# Altium PCB BMS_Slave_8S V0.1.PcbDoc (part 1 of 2)
Units mm, origin at the board's own origin, x right, y up, seen from the top; angles counter-clockwise.
Board outline 54 x 106.3 mm, 2 copper layers (Top Layer, Bottom Layer); 166 components, 124 nets, 443 pads, 56 vias.
Unrouted connection lines stored in the file: 225.
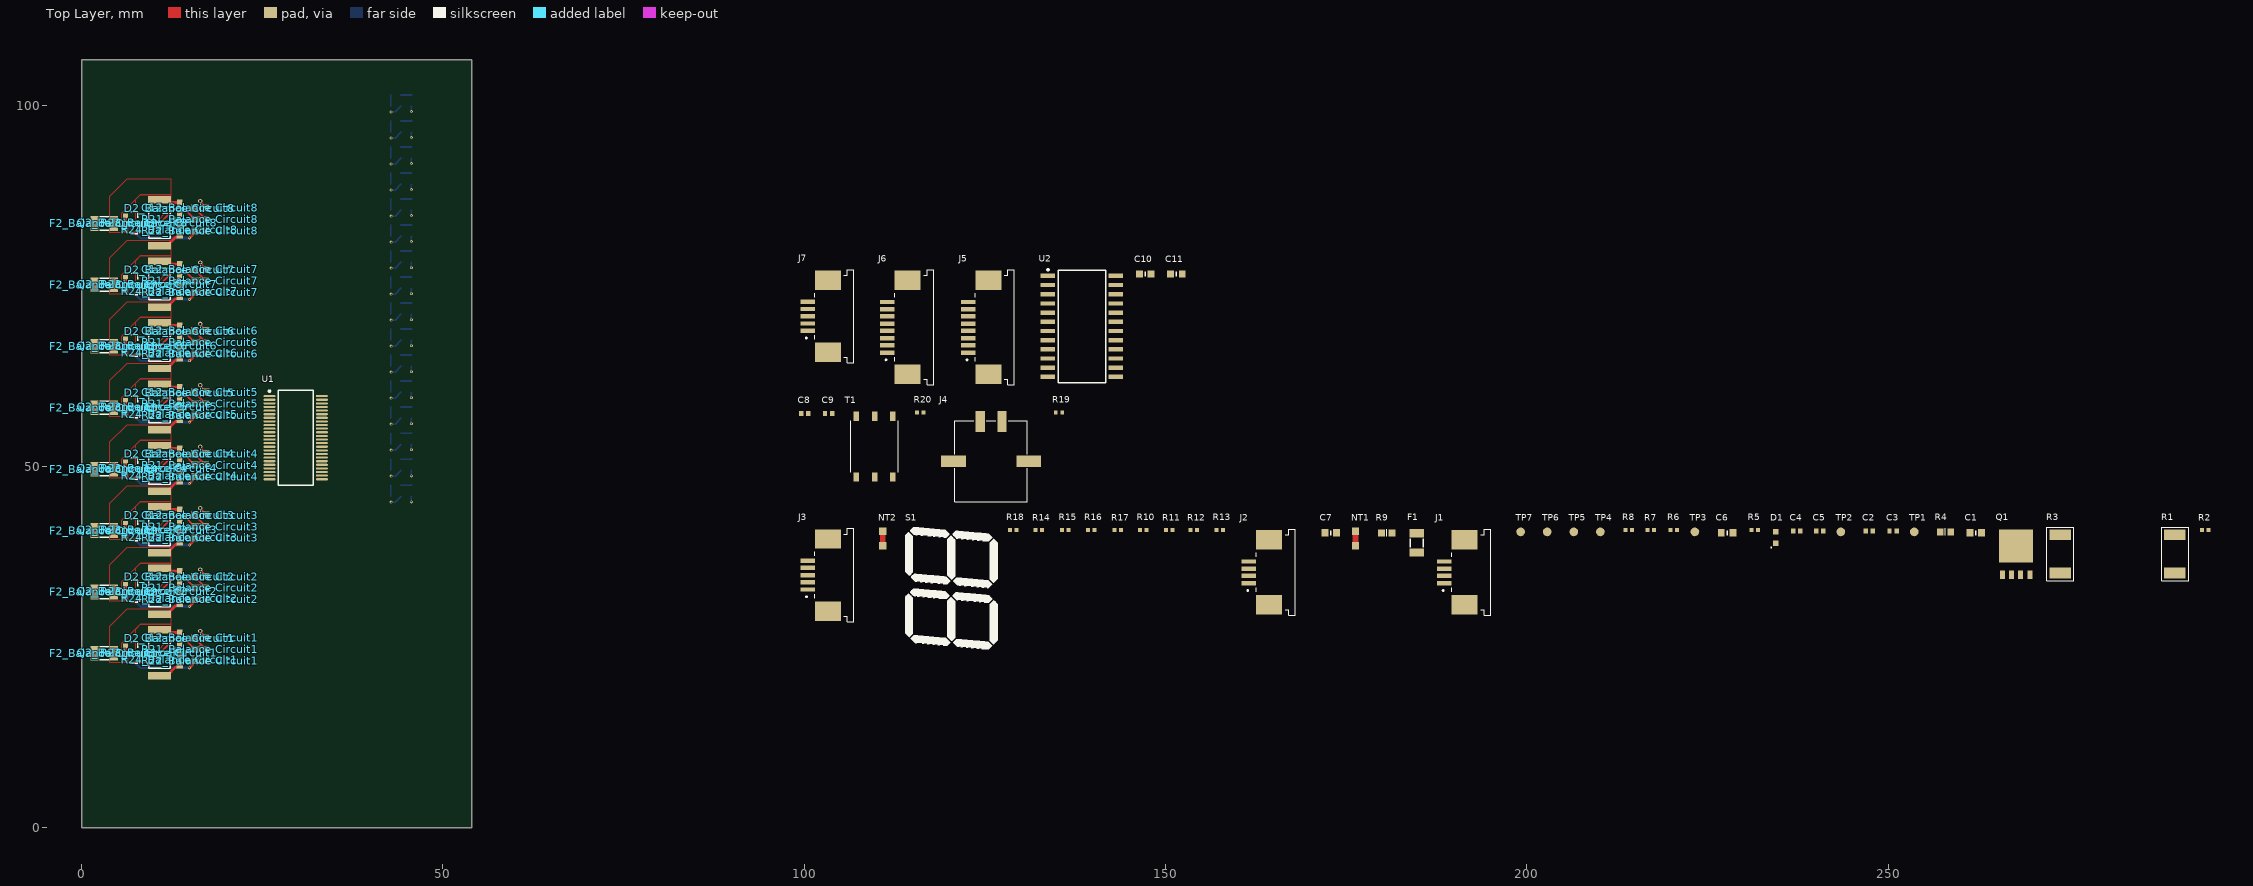
[diagram p0: Top Layer view]
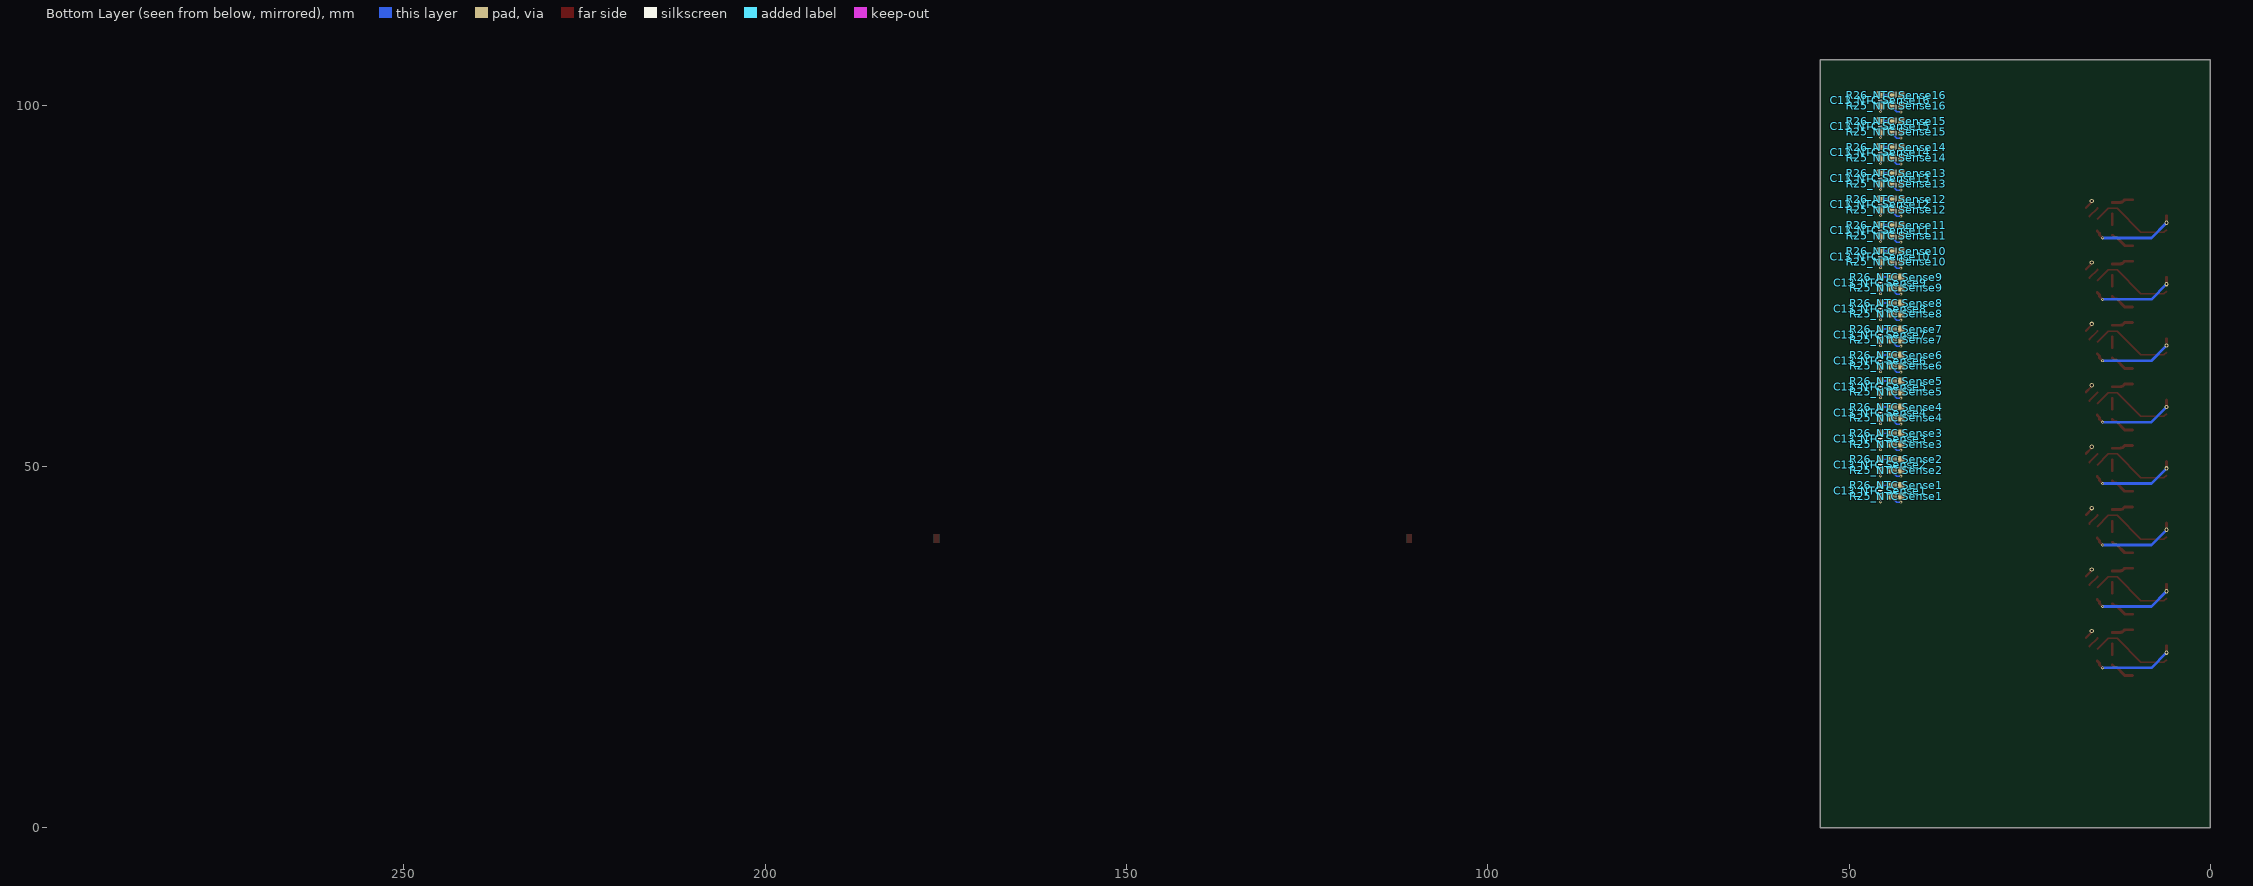
[diagram p1: Bottom Layer view, seen from below]

## Layer stack, top to bottom
Top Solder: solder mask 0.0102, Solder Resist, Dk 3.5
Top Layer: signal copper 0.0356
Dielectric 1: dielectric 0.32, FR-4, Dk 4.8
Bottom Layer: signal copper 0.0356
Bottom Solder: solder mask 0.0102, Solder Resist, Dk 3.5

## Board outline
0,0 0,106.3 54,106.3 54,0

## Design rules (kind name [scope] priority, off if disabled: settings)
BoardOutlineClearance BoardOutlineClearance_Silk [OnLayer('Top Overlay') or OnLayer('Bottom Overlay')] p1: gap=0 ignorepadtopadclearanceinfootprint=FALSE
BoardOutlineClearance [All] p2: gap=0.5 ignorepadtopadclearanceinfootprint=FALSE except(0: Arc-SplitContinuation Track-SplitContinuation SMDPad-SplitContinuation THPad-SplitContinuation Via-SplitContinuation Fill-SplitContinuation Poly-SplitContinuation Region-SplitContinuation Text-SplitContinuation)
Clearance [All] p1: gap=0.152 ignorepadtopadclearanceinfootprint=FALSE
ComponentClearance ComponentClearance-NT [HasFootprint('NetTie')] p1: gap=0 collisioncheckmode=3 verticalgap=0 showdistances=FALSE
ComponentClearance [All] p2: gap=0.254 collisioncheckmode=3 verticalgap=0.254 showdistances=FALSE
DiffPairsRouting [InDifferentialPairClass('isoSPI')] p1: maxlimit=0.254 minlimit=0.254 mostfreqgap=0.254 toplayer_minwidth=0.152 toplayer_maxwidth=0.152 toplayer_prefwidth=0.152 bottomlayer_minwidth=0.152 bottomlayer_maxwidth=0.152 bottomlayer_prefwidth=0.152 impedanceprofiledriven=TRUE impedanceprofileid={1BC84866-0E51-48B1-BDBB-AED9452DC2EB} maxuncoupledlength=50
HoleSize [All] p1: absolutevalues=TRUE maxlimit=6.3 minlimit=0.2 maxpercent=80.000 minpercent=20.000
HoleToHoleClearance [All] p1: gap=0.279 allowstackedmicrovias=TRUE
MinimumAnnularRing [All] p1: minimumring=0.152
MinimumSolderMaskSliver [All] p1: minsoldermaskwidth=0.102
PlaneConnect [All] p1: planeconnectstyle=Direct reliefexpansion=0.508 reliefentries=4 reliefconductorwidth=0.254 reliefairgap=0.254
PolygonConnect PolygonConnect-Passive [HasFootprint('C-0402') or HasFootprint('R_0402') or HasFootprint('C_0603') or HasFootprint('R-0603')] p1: thpad.connectstyle=Direct thpad.reliefconductorwidth=0.254 thpad.reliefentries=4 thpad.polygonreliefangle="90 Angle" thpad.airgapwidth=0.254 smdpad.connectstyle=Relief smdpad.reliefconductorwidth=0.254 smdpad.reliefentries=4 smdpad.polygonreliefangle="90 Angle" smdpad.airgapwidth=0.254 via.connectstyle=Direct via.reliefconductorwidth=0.254 via.reliefentries=4 via.polygonreliefangle="90 Angle" via.airgapwidth=0.254
PolygonConnect "Power Connect" [All] p2: connectstyle=Direct reliefconductorwidth=0.254 reliefentries=4 polygonreliefangle="90 Angle" airgapwidth=0.254
PolygonConnect [All] p3: thpad.connectstyle=Direct thpad.reliefconductorwidth=0.254 thpad.reliefentries=4 thpad.polygonreliefangle="90 Angle" thpad.airgapwidth=0.254 smdpad.connectstyle=Relief smdpad.reliefconductorwidth=0.254 smdpad.reliefentries=4 smdpad.polygonreliefangle="90 Angle" smdpad.airgapwidth=0.254 via.connectstyle=Direct via.reliefconductorwidth=0.254 via.reliefentries=4 via.polygonreliefangle="90 Angle" via.airgapwidth=0.254
RoomDefinition "Balance Circuit2" [InComponentClass('Balance Circuit2')] p1: confinementstyle=ConfineIn formatcopy=TRUE lockcomponents=FALSE outline 0.575,28.475 18.2,28.475 18.2,36.975 0.575,36.975
RoomDefinition "Balance Circuit1" [InComponentClass('Balance Circuit1')] p2: confinementstyle=ConfineIn formatcopy=TRUE lockcomponents=FALSE outline 0.575,19.975 18.2,19.975 18.2,28.475 0.575,28.475
RoomDefinition "Balance Circuit3" [InComponentClass('Balance Circuit3')] p3: confinementstyle=ConfineIn formatcopy=TRUE lockcomponents=FALSE outline 0.575,36.975 18.2,36.975 18.2,45.475 0.575,45.475
RoomDefinition "Balance Circuit4" [InComponentClass('Balance Circuit4')] p4: confinementstyle=ConfineIn formatcopy=TRUE lockcomponents=FALSE outline 0.575,45.475 18.2,45.475 18.2,53.975 0.575,53.975
RoomDefinition "Balance Circuit5" [InComponentClass('Balance Circuit5')] p5: confinementstyle=ConfineIn formatcopy=TRUE lockcomponents=FALSE outline 0.575,53.975 18.2,53.975 18.2,62.475 0.575,62.475
RoomDefinition "Balance Circuit6" [InComponentClass('Balance Circuit6')] p6: confinementstyle=ConfineIn formatcopy=TRUE lockcomponents=FALSE outline 0.575,62.475 18.2,62.475 18.2,70.975 0.575,70.975
RoomDefinition "Balance Circuit7" [InComponentClass('Balance Circuit7')] p7: confinementstyle=ConfineIn formatcopy=TRUE lockcomponents=FALSE outline 0.575,70.975 18.2,70.975 18.2,79.475 0.575,79.475
RoomDefinition "Balance Circuit8" [InComponentClass('Balance Circuit8')] p8: confinementstyle=ConfineIn formatcopy=TRUE lockcomponents=FALSE outline 0.575,79.475 18.2,79.475 18.2,87.975 0.575,87.975
RoomDefinition "U_Temperature Sensing" [InComponentClass('U_Temperature Sensing')] p9: confinementstyle=ConfineIn formatcopy=TRUE lockcomponents=FALSE outline 98.925,60.75 153.325,60.75 153.325,77.775 98.925,77.775
RoomDefinition U_IsoSPI [InComponentClass('U_IsoSPI')] p10: confinementstyle=ConfineIn formatcopy=TRUE lockcomponents=FALSE outline 98.85,44.6 136.45,44.6 136.45,58.2 98.85,58.2
RoomDefinition "NTC Sense16" [InComponentClass('NTC Sense16')] p11: confinementstyle=ConfineIn formatcopy=TRUE lockcomponents=FALSE outline 41.75,98.85 46.75,98.85 46.75,102.45 41.75,102.45
RoomDefinition "NTC Sense15" [InComponentClass('NTC Sense15')] p12: confinementstyle=ConfineIn formatcopy=TRUE lockcomponents=FALSE outline 41.75,95.25 46.75,95.25 46.75,98.85 41.75,98.85
RoomDefinition "NTC Sense14" [InComponentClass('NTC Sense14')] p13: confinementstyle=ConfineIn formatcopy=TRUE lockcomponents=FALSE outline 41.75,91.65 46.75,91.65 46.75,95.25 41.75,95.25
RoomDefinition "NTC Sense13" [InComponentClass('NTC Sense13')] p14: confinementstyle=ConfineIn formatcopy=TRUE lockcomponents=FALSE outline 41.75,88.05 46.75,88.05 46.75,91.65 41.75,91.65
RoomDefinition "NTC Sense12" [InComponentClass('NTC Sense12')] p15: confinementstyle=ConfineIn formatcopy=TRUE lockcomponents=FALSE outline 41.75,84.45 46.75,84.45 46.75,88.05 41.75,88.05
RoomDefinition "NTC Sense11" [InComponentClass('NTC Sense11')] p16: confinementstyle=ConfineIn formatcopy=TRUE lockcomponents=FALSE outline 41.75,80.85 46.75,80.85 46.75,84.45 41.75,84.45
RoomDefinition "NTC Sense10" [InComponentClass('NTC Sense10')] p17: confinementstyle=ConfineIn formatcopy=TRUE lockcomponents=FALSE outline 41.75,77.25 46.75,77.25 46.75,80.85 41.75,80.85
RoomDefinition "NTC Sense9" [InComponentClass('NTC Sense9')] p18: confinementstyle=ConfineIn formatcopy=TRUE lockcomponents=FALSE outline 41.75,73.65 46.75,73.65 46.75,77.25 41.75,77.25
RoomDefinition "NTC Sense8" [InComponentClass('NTC Sense8')] p19: confinementstyle=ConfineIn formatcopy=TRUE lockcomponents=FALSE outline 41.75,70.05 46.75,70.05 46.75,73.65 41.75,73.65
RoomDefinition "NTC Sense7" [InComponentClass('NTC Sense7')] p20: confinementstyle=ConfineIn formatcopy=TRUE lockcomponents=FALSE outline 41.75,66.45 46.75,66.45 46.75,70.05 41.75,70.05
RoomDefinition "NTC Sense6" [InComponentClass('NTC Sense6')] p21: confinementstyle=ConfineIn formatcopy=TRUE lockcomponents=FALSE outline 41.75,62.85 46.75,62.85 46.75,66.45 41.75,66.45
RoomDefinition "NTC Sense5" [InComponentClass('NTC Sense5')] p22: confinementstyle=ConfineIn formatcopy=TRUE lockcomponents=FALSE outline 41.75,59.25 46.75,59.25 46.75,62.85 41.75,62.85
RoomDefinition "NTC Sense4" [InComponentClass('NTC Sense4')] p23: confinementstyle=ConfineIn formatcopy=TRUE lockcomponents=FALSE outline 41.75,55.65 46.75,55.65 46.75,59.25 41.75,59.25
RoomDefinition "NTC Sense3" [InComponentClass('NTC Sense3')] p24: confinementstyle=ConfineIn formatcopy=TRUE lockcomponents=FALSE outline 41.75,52.05 46.75,52.05 46.75,55.65 41.75,55.65
RoomDefinition "NTC Sense2" [InComponentClass('NTC Sense2')] p25: confinementstyle=ConfineIn formatcopy=TRUE lockcomponents=FALSE outline 41.75,48.45 46.75,48.45 46.75,52.05 41.75,52.05
RoomDefinition "NTC Sense1" [InComponentClass('NTC Sense1')] p26: confinementstyle=ConfineIn formatcopy=TRUE lockcomponents=FALSE outline 41.75,44.85 46.75,44.85 46.75,48.45 41.75,48.45
RoutingVias [All] p1: holewidth=0.3 width=0.6 viastyle="Through Hole" minholewidth=0.2 minwidth=0.4 maxholewidth=0.4 maxwidth=0.7
ShortCircuit ShortCircuit_NT [HasFootprint('NetTie')] p1: allowed=TRUE
ShortCircuit [All] p2: allowed=FALSE
SilkToSilkClearance [All] p1: silktosilkclearance=0
SilkToSolderMaskClearance [IsPad] p1: minsilkscreentomaskgap=0.152 clearancetoexposedcopper=TRUE
SolderMaskExpansion SolderMaskExpansion_Via [isvia] p1: expansion=0.102 istentingtop=TRUE
SolderMaskExpansion [All] p2: expansion=0.051 istentingtop=FALSE
Width [All] p1: maxlimit=2.54 minlimit=0.152 preferedwidth=0.203
21 further rules are at their usual default settings.

## Classes and differential pairs
channel class "NTC Sense V0.1": "NTC Sense1" "NTC Sense2" "NTC Sense3" "NTC Sense4" "NTC Sense5" "NTC Sense6" "NTC Sense7" "NTC Sense8" "NTC Sense9" "NTC Sense10" "NTC Sense11" "NTC Sense12" "NTC Sense13" "NTC Sense14" "NTC Sense15" "NTC Sense16"
channel class "Balance V0.1": "Balance Circuit1" "Balance Circuit2" "Balance Circuit3" "Balance Circuit4" "Balance Circuit5" "Balance Circuit6" "Balance Circuit7" "Balance Circuit8"
differential pair class isoSPI: isoSPI. PORTA
net class Vc[8..1]: Vc1 Vc2 Vc3 Vc4 Vc5 Vc6 Vc7 Vc8
net class T[12..1]: B2 B3 B4 B5 B6 B7 B8 T8 T9 T10 T11 T12
net class S[8..1]: S1 S2 S3 S4 S5 S6 S7 S8
net class Out[16..1]: Out1 Out2 Out3 Out4 Out5 Out6 Out7 Out8 Out9 Out10 Out11 Out12 Out13 Out14 Out15 Out16
net class NTC[16..1]: NTC1 NTC2 NTC3 NTC4 NTC5 NTC6 NTC7 NTC8 NTC9 NTC10 NTC11 NTC12 NTC13 NTC14 NTC15 NTC16
net class C[8..1]: C1 C2 C3 C4 C5 C6 C7 C8
net class BalanceNetClass: B1 B2 B3 B4 B5 B6 B7 B8 "NetD2_Balance Circuit1_2" "NetD2_Balance Circuit2_2" "NetD2_Balance Circuit3_2" "NetD2_Balance Circuit4_2" "NetD2_Balance Circuit5_2" "NetD2_Balance Circuit6_2" "NetD2_Balance Circuit7_2" "NetD2_Balance Circuit8_2" T8
net class B[12..1]: B1 B2 B3 B4 B5 B6 B7 B8 B9 B10 B11 B12
component class "U_Temperature Sensing": C10 C11 J5 J6 J7 U2
component class U_IsoSPI: C8 C9 J4 R19 R20 T1
component class "U_Cell Monitor": C1 C2 C3 C4 C5 C6 C7 D1 F1 J1 J2 J3 NT1 NT2 Q1 R1 R2 R3 R4 R5 R6 R7 R8 R9 R10 R11 R12 R13 R14 R15 R16 R17 R18 S1 TP1 TP2 TP3 TP4 TP5 TP6 TP7 U1
component class "NTC Sense16": "C13_NTC Sense16" "R25_NTC Sense16" "R26_NTC Sense16"
component class "NTC Sense15": "C13_NTC Sense15" "R25_NTC Sense15" "R26_NTC Sense15"
component class "NTC Sense14": "C13_NTC Sense14" "R25_NTC Sense14" "R26_NTC Sense14"
component class "NTC Sense13": "C13_NTC Sense13" "R25_NTC Sense13" "R26_NTC Sense13"
component class "NTC Sense12": "C13_NTC Sense12" "R25_NTC Sense12" "R26_NTC Sense12"
component class "NTC Sense11": "C13_NTC Sense11" "R25_NTC Sense11" "R26_NTC Sense11"
component class "NTC Sense10": "C13_NTC Sense10" "R25_NTC Sense10" "R26_NTC Sense10"
component class "NTC Sense9": "C13_NTC Sense9" "R25_NTC Sense9" "R26_NTC Sense9"
component class "NTC Sense8": "C13_NTC Sense8" "R25_NTC Sense8" "R26_NTC Sense8"
component class "NTC Sense7": "C13_NTC Sense7" "R25_NTC Sense7" "R26_NTC Sense7"
component class "NTC Sense6": "C13_NTC Sense6" "R25_NTC Sense6" "R26_NTC Sense6"
component class "NTC Sense5": "C13_NTC Sense5" "R25_NTC Sense5" "R26_NTC Sense5"
component class "NTC Sense4": "C13_NTC Sense4" "R25_NTC Sense4" "R26_NTC Sense4"
component class "NTC Sense3": "C13_NTC Sense3" "R25_NTC Sense3" "R26_NTC Sense3"
component class "NTC Sense2": "C13_NTC Sense2" "R25_NTC Sense2" "R26_NTC Sense2"
component class "NTC Sense1": "C13_NTC Sense1" "R25_NTC Sense1" "R26_NTC Sense1"
component class "Balance Circuit8": "C12_Balance Circuit8" "D2_Balance Circuit8" "F2_Balance Circuit8" "Q2_Balance Circuit8" "R21_Balance Circuit8" "R22_Balance Circuit8" "R23_Balance Circuit8" "R24_Balance Circuit8"
component class "Balance Circuit7": "C12_Balance Circuit7" "D2_Balance Circuit7" "F2_Balance Circuit7" "Q2_Balance Circuit7" "R21_Balance Circuit7" "R22_Balance Circuit7" "R23_Balance Circuit7" "R24_Balance Circuit7"
component class "Balance Circuit6": "C12_Balance Circuit6" "D2_Balance Circuit6" "F2_Balance Circuit6" "Q2_Balance Circuit6" "R21_Balance Circuit6" "R22_Balance Circuit6" "R23_Balance Circuit6" "R24_Balance Circuit6"
component class "Balance Circuit5": "C12_Balance Circuit5" "D2_Balance Circuit5" "F2_Balance Circuit5" "Q2_Balance Circuit5" "R21_Balance Circuit5" "R22_Balance Circuit5" "R23_Balance Circuit5" "R24_Balance Circuit5"
component class "Balance Circuit4": "C12_Balance Circuit4" "D2_Balance Circuit4" "F2_Balance Circuit4" "Q2_Balance Circuit4" "R21_Balance Circuit4" "R22_Balance Circuit4" "R23_Balance Circuit4" "R24_Balance Circuit4"
component class "Balance Circuit3": "C12_Balance Circuit3" "D2_Balance Circuit3" "F2_Balance Circuit3" "Q2_Balance Circuit3" "R21_Balance Circuit3" "R22_Balance Circuit3" "R23_Balance Circuit3" "R24_Balance Circuit3"
component class "Balance Circuit2": "C12_Balance Circuit2" "D2_Balance Circuit2" "F2_Balance Circuit2" "Q2_Balance Circuit2" "R21_Balance Circuit2" "R22_Balance Circuit2" "R23_Balance Circuit2" "R24_Balance Circuit2"
component class "Balance Circuit1": "C12_Balance Circuit1" "D2_Balance Circuit1" "F2_Balance Circuit1" "Q2_Balance Circuit1" "R21_Balance Circuit1" "R22_Balance Circuit1" "R23_Balance Circuit1" "R24_Balance Circuit1"
differential pair PORTA: +PORTA_P -PORTA_N
differential pair isoSPI.: +isoSPI._P -isoSPI._N

## Components (designator, comment, footprint, x,y, rotation, side; value= is the part's Value field where it differs from the comment)
C1 "C" C_0603 262.138,40.807 r0 top value=100nF
C2 "C" C-0402 247.406,41.061 r0 top value=1uF
C3 "C" C-0402 250.708,41.061 r0 top value=100nF
C4 "C" C-0402 237.373,41.061 r0 top value=100nF
C5 "C" C-0402 240.548,41.061 r0 top value=1uF
C6 "C" C_0603 227.721,40.807 r0 top value=1uF
C7 "C" C_0603 172.857,40.807 r0 top value=10nF
C8 "C" C-0402 100.086,57.317 r0 top value=10nF
C9 "C" C-0402 103.388,57.317 r0 top value=10nF
C10 "C" C_0603 147.203,76.621 r0 top value=100nF
C11 "C" C_0603 151.521,76.621 r0 top value=1uF
"C12_Balance Circuit1" "C" C_0603 16.419,26.263 r180 top value=10nF (schematic designator C12)
"C12_Balance Circuit2" "C" C_0603 16.419,34.763 r180 top value=10nF (schematic designator C12)
"C12_Balance Circuit3" "C" C_0603 16.419,43.263 r180 top value=10nF (schematic designator C12)
"C12_Balance Circuit4" "C" C_0603 16.419,51.763 r180 top value=10nF (schematic designator C12)
"C12_Balance Circuit5" "C" C_0603 16.419,60.263 r180 top value=10nF (schematic designator C12)
"C12_Balance Circuit6" "C" C_0603 16.419,68.763 r180 top value=10nF (schematic designator C12)
"C12_Balance Circuit7" "C" C_0603 16.419,77.263 r180 top value=10nF (schematic designator C12)
"C12_Balance Circuit8" "C" C_0603 16.419,85.763 r180 top value=10nF (schematic designator C12)
"C13_NTC Sense1" "C" C_0603 45.7,46.65 r90 bottom value=10nF (schematic designator C13)
"C13_NTC Sense2" "C" C_0603 45.7,50.25 r90 bottom value=10nF (schematic designator C13)
"C13_NTC Sense3" "C" C_0603 45.7,53.85 r90 bottom value=10nF (schematic designator C13)
"C13_NTC Sense4" "C" C_0603 45.7,57.45 r90 bottom value=10nF (schematic designator C13)
"C13_NTC Sense5" "C" C_0603 45.7,61.05 r90 bottom value=10nF (schematic designator C13)
"C13_NTC Sense6" "C" C_0603 45.7,64.65 r90 bottom value=10nF (schematic designator C13)
"C13_NTC Sense7" "C" C_0603 45.7,68.25 r90 bottom value=10nF (schematic designator C13)
"C13_NTC Sense8" "C" C_0603 45.7,71.85 r90 bottom value=10nF (schematic designator C13)
"C13_NTC Sense9" "C" C_0603 45.7,75.45 r90 bottom value=10nF (schematic designator C13)
"C13_NTC Sense10" "C" C_0603 45.7,79.05 r90 bottom value=10nF (schematic designator C13)
"C13_NTC Sense11" "C" C_0603 45.7,82.65 r90 bottom value=10nF (schematic designator C13)
"C13_NTC Sense12" "C" C_0603 45.7,86.25 r90 bottom value=10nF (schematic designator C13)
"C13_NTC Sense13" "C" C_0603 45.7,89.85 r90 bottom value=10nF (schematic designator C13)
"C13_NTC Sense14" "C" C_0603 45.7,93.45 r90 bottom value=10nF (schematic designator C13)
"C13_NTC Sense15" "C" C_0603 45.7,97.05 r90 bottom value=10nF (schematic designator C13)
"C13_NTC Sense16" "C" C_0603 45.7,100.65 r90 bottom value=10nF (schematic designator C13)
D1 "150060SS55040" "LED (0603)" 234.452,40.172 r90 top
"D2_Balance Circuit1" "150060BS55040" "LED (0603)" 13.575,26.225 r90 top (schematic designator D2)
"D2_Balance Circuit2" "150060BS55040" "LED (0603)" 13.575,34.725 r90 top (schematic designator D2)
"D2_Balance Circuit3" "150060BS55040" "LED (0603)" 13.575,43.225 r90 top (schematic designator D2)
"D2_Balance Circuit4" "150060BS55040" "LED (0603)" 13.575,51.725 r90 top (schematic designator D2)
"D2_Balance Circuit5" "150060BS55040" "LED (0603)" 13.575,60.225 r90 top (schematic designator D2)
"D2_Balance Circuit6" "150060BS55040" "LED (0603)" 13.575,68.725 r90 top (schematic designator D2)
"D2_Balance Circuit7" "150060BS55040" "LED (0603)" 13.575,77.225 r90 top (schematic designator D2)
"D2_Balance Circuit8" "150060BS55040" "LED (0603)" 13.575,85.725 r90 top (schematic designator D2)
F1 "0466.500NR" 0466.500NR 184.795,39.41 r90 top
"F2_Balance Circuit1" "0466.500NR" 0466.500NR 3.125,24.125 r0 top (schematic designator F2)
"F2_Balance Circuit2" "0466.500NR" 0466.500NR 3.125,32.625 r0 top (schematic designator F2)
"F2_Balance Circuit3" "0466.500NR" 0466.500NR 3.125,41.125 r0 top (schematic designator F2)
"F2_Balance Circuit4" "0466.500NR" 0466.500NR 3.125,49.625 r0 top (schematic designator F2)
"F2_Balance Circuit5" "0466.500NR" 0466.500NR 3.125,58.125 r0 top (schematic designator F2)
"F2_Balance Circuit6" "0466.500NR" 0466.500NR 3.125,66.625 r0 top (schematic designator F2)
"F2_Balance Circuit7" "0466.500NR" 0466.500NR 3.125,75.125 r0 top (schematic designator F2)
"F2_Balance Circuit8" "0466.500NR" 0466.500NR 3.125,83.625 r0 top (schematic designator F2)
J1 "84953-4" 84953-4 188.605,35.346 r90 top
J2 "84953-4" 84953-4 161.554,35.346 r90 top
J3 "84953-5" 84953-5 100.467,34.965 r90 top
J4 "2-1445057-2" TE_2-1445057-2 125.867,50.713 r0 top
J5 "84953-8" 84953-8 122.692,69.255 r90 top
J6 "84953-8" 84953-8 111.516,69.255 r90 top
J7 "84953-5" 84953-5 100.467,70.779 r90 top
NT1 "NetTie" NetTie 176.286,39.029 r90 top net-tie
NT2 "NetTie" NetTie 110.881,39.029 r90 top net-tie
Q1 "PHPT60603NYX" "LFPAK56 (SOT669)" 267.726,36.997 r0 top
"Q2_Balance Circuit1" "NX2301P,215" FP-SOT23-MFG 7.075,24.225 r0 top (schematic designator Q2)
"Q2_Balance Circuit2" "NX2301P,215" FP-SOT23-MFG 7.075,32.725 r0 top (schematic designator Q2)
"Q2_Balance Circuit3" "NX2301P,215" FP-SOT23-MFG 7.075,41.225 r0 top (schematic designator Q2)
"Q2_Balance Circuit4" "NX2301P,215" FP-SOT23-MFG 7.075,49.725 r0 top (schematic designator Q2)
"Q2_Balance Circuit5" "NX2301P,215" FP-SOT23-MFG 7.075,58.225 r0 top (schematic designator Q2)
"Q2_Balance Circuit6" "NX2301P,215" FP-SOT23-MFG 7.075,66.725 r0 top (schematic designator Q2)
"Q2_Balance Circuit7" "NX2301P,215" FP-SOT23-MFG 7.075,75.225 r0 top (schematic designator Q2)
"Q2_Balance Circuit8" "NX2301P,215" FP-SOT23-MFG 7.075,83.725 r0 top (schematic designator Q2)
R1 "Resistor" R_2010 289.697,37.886 r90 top value=100
R2 "Resistor" R_0402 293.888,41.188 r0 top value=1M
R3 "Resistor" R_2010 273.822,37.886 r90 top value=100
R4 "Resistor" R-0603 257.947,40.934 r0 top value=1k
R5 "Resistor" R_0402 231.531,41.188 r0 top value=0
R6 "Resistor" R_0402 220.355,41.188 r0 top value=0
R7 "Resistor" R_0402 217.18,41.188 r0 top value=1.21k
R8 "Resistor" R_0402 214.132,41.188 r0 top value=2.8k
R9 "Resistor" R-0603 180.604,40.807 r0 top value=100
R10 "Resistor" R_0402 146.949,41.188 r0 top value=0
R11 "Resistor" R_0402 150.505,41.188 r0 top value=0
R12 "Resistor" R_0402 153.934,41.188 r0 top value=0
R13 "Resistor" R_0402 157.49,41.188 r0 top value=0
R14 "Resistor" R_0402 132.471,41.188 r0 top value=0
R15 "Resistor" R_0402 136.154,41.188 r0 top value=0
R16 "Resistor" R_0402 139.71,41.188 r0 top value=0
R17 "Resistor" R_0402 143.393,41.188 r0 top value=0
R18 "Resistor" R_0402 128.915,41.188 r0 top value=0
R19 "Resistor" R_0402 135.265,57.444 r0 top value=51
R20 "Resistor" R_0402 116.088,57.444 r0 top value=51
"R21_Balance Circuit1" "Resistor" R-0603 16.4,24.675 r0 top value=100 (schematic designator R21)
"R21_Balance Circuit2" "Resistor" R-0603 16.4,33.175 r0 top value=100 (schematic designator R21)
"R21_Balance Circuit3" "Resistor" R-0603 16.4,41.675 r0 top value=100 (schematic designator R21)
"R21_Balance Circuit4" "Resistor" R-0603 16.4,50.175 r0 top value=100 (schematic designator R21)
"R21_Balance Circuit5" "Resistor" R-0603 16.4,58.675 r0 top value=100 (schematic designator R21)
"R21_Balance Circuit6" "Resistor" R-0603 16.4,67.175 r0 top value=100 (schematic designator R21)
"R21_Balance Circuit7" "Resistor" R-0603 16.4,75.675 r0 top value=100 (schematic designator R21)
"R21_Balance Circuit8" "Resistor" R-0603 16.4,84.175 r0 top value=100 (schematic designator R21)
"R22_Balance Circuit1" "Resistor" R-0603 16.4,23.1 r0 top value=3.3k (schematic designator R22)
"R22_Balance Circuit2" "Resistor" R-0603 16.4,31.6 r0 top value=3.3k (schematic designator R22)
"R22_Balance Circuit3" "Resistor" R-0603 16.4,40.1 r0 top value=3.3k (schematic designator R22)
"R22_Balance Circuit4" "Resistor" R-0603 16.4,48.6 r0 top value=3.3k (schematic designator R22)
"R22_Balance Circuit5" "Resistor" R-0603 16.4,57.1 r0 top value=3.3k (schematic designator R22)
"R22_Balance Circuit6" "Resistor" R-0603 16.4,65.6 r0 top value=3.3k (schematic designator R22)
"R22_Balance Circuit7" "Resistor" R-0603 16.4,74.1 r0 top value=3.3k (schematic designator R22)
"R22_Balance Circuit8" "Resistor" R-0603 16.4,82.6 r0 top value=3.3k (schematic designator R22)
"R23_Balance Circuit1" "Resistor" R_2512 10.769,24.225 r90 top value=R (schematic designator R23)
"R23_Balance Circuit2" "Resistor" R_2512 10.769,32.725 r90 top value=R (schematic designator R23)
"R23_Balance Circuit3" "Resistor" R_2512 10.769,41.225 r90 top value=R (schematic designator R23)
"R23_Balance Circuit4" "Resistor" R_2512 10.769,49.725 r90 top value=R (schematic designator R23)
"R23_Balance Circuit5" "Resistor" R_2512 10.769,58.225 r90 top value=R (schematic designator R23)
"R23_Balance Circuit6" "Resistor" R_2512 10.769,66.725 r90 top value=R (schematic designator R23)
"R23_Balance Circuit7" "Resistor" R_2512 10.769,75.225 r90 top value=R (schematic designator R23)
"R23_Balance Circuit8" "Resistor" R_2512 10.769,83.725 r90 top value=R (schematic designator R23)
"R24_Balance Circuit1" "Resistor" R-0603 13.575,23.225 r90 top value=1k (schematic designator R24)
"R24_Balance Circuit2" "Resistor" R-0603 13.575,31.725 r90 top value=1k (schematic designator R24)
"R24_Balance Circuit3" "Resistor" R-0603 13.575,40.225 r90 top value=1k (schematic designator R24)
"R24_Balance Circuit4" "Resistor" R-0603 13.575,48.725 r90 top value=1k (schematic designator R24)
"R24_Balance Circuit5" "Resistor" R-0603 13.575,57.225 r90 top value=1k (schematic designator R24)
"R24_Balance Circuit6" "Resistor" R-0603 13.575,65.725 r90 top value=1k (schematic designator R24)
"R24_Balance Circuit7" "Resistor" R-0603 13.575,74.225 r90 top value=1k (schematic designator R24)
"R24_Balance Circuit8" "Resistor" R-0603 13.575,82.725 r90 top value=1k (schematic designator R24)
"R25_NTC Sense1" "Resistor" R-0603 43.5,45.9 r0 bottom value=10k (schematic designator R25)
"R25_NTC Sense2" "Resistor" R-0603 43.5,49.5 r0 bottom value=10k (schematic designator R25)
"R25_NTC Sense3" "Resistor" R-0603 43.5,53.1 r0 bottom value=10k (schematic designator R25)
"R25_NTC Sense4" "Resistor" R-0603 43.5,56.7 r0 bottom value=10k (schematic designator R25)
"R25_NTC Sense5" "Resistor" R-0603 43.5,60.3 r0 bottom value=10k (schematic designator R25)
"R25_NTC Sense6" "Resistor" R-0603 43.5,63.9 r0 bottom value=10k (schematic designator R25)
"R25_NTC Sense7" "Resistor" R-0603 43.5,67.5 r0 bottom value=10k (schematic designator R25)
"R25_NTC Sense8" "Resistor" R-0603 43.5,71.1 r0 bottom value=10k (schematic designator R25)
"R25_NTC Sense9" "Resistor" R-0603 43.5,74.7 r0 bottom value=10k (schematic designator R25)
"R25_NTC Sense10" "Resistor" R-0603 43.5,78.3 r0 bottom value=10k (schematic designator R25)
"R25_NTC Sense11" "Resistor" R-0603 43.5,81.9 r0 bottom value=10k (schematic designator R25)
"R25_NTC Sense12" "Resistor" R-0603 43.5,85.5 r0 bottom value=10k (schematic designator R25)
"R25_NTC Sense13" "Resistor" R-0603 43.5,89.1 r0 bottom value=10k (schematic designator R25)
"R25_NTC Sense14" "Resistor" R-0603 43.5,92.7 r0 bottom value=10k (schematic designator R25)
"R25_NTC Sense15" "Resistor" R-0603 43.5,96.3 r0 bottom value=10k (schematic designator R25)
"R25_NTC Sense16" "Resistor" R-0603 43.5,99.9 r0 bottom value=10k (schematic designator R25)
"R26_NTC Sense1" "Resistor" R-0603 43.5,47.4 r180 bottom value=100 (schematic designator R26)
"R26_NTC Sense2" "Resistor" R-0603 43.5,51 r180 bottom value=100 (schematic designator R26)
"R26_NTC Sense3" "Resistor" R-0603 43.5,54.6 r180 bottom value=100 (schematic designator R26)
"R26_NTC Sense4" "Resistor" R-0603 43.5,58.2 r180 bottom value=100 (schematic designator R26)
"R26_NTC Sense5" "Resistor" R-0603 43.5,61.8 r180 bottom value=100 (schematic designator R26)
"R26_NTC Sense6" "Resistor" R-0603 43.5,65.4 r180 bottom value=100 (schematic designator R26)
"R26_NTC Sense7" "Resistor" R-0603 43.5,69 r180 bottom value=100 (schematic designator R26)
"R26_NTC Sense8" "Resistor" R-0603 43.5,72.6 r180 bottom value=100 (schematic designator R26)
"R26_NTC Sense9" "Resistor" R-0603 43.5,76.2 r180 bottom value=100 (schematic designator R26)
"R26_NTC Sense10" "Resistor" R-0603 43.5,79.8 r180 bottom value=100 (schematic designator R26)
"R26_NTC Sense11" "Resistor" R-0603 43.5,83.4 r180 bottom value=100 (schematic designator R26)
"R26_NTC Sense12" "Resistor" R-0603 43.5,87 r180 bottom value=100 (schematic designator R26)
"R26_NTC Sense13" "Resistor" R-0603 43.5,90.6 r180 bottom value=100 (schematic designator R26)
"R26_NTC Sense14" "Resistor" R-0603 43.5,94.2 r180 bottom value=100 (schematic designator R26)
"R26_NTC Sense15" "Resistor" R-0603 43.5,97.8 r180 bottom value=100 (schematic designator R26)
"R26_NTC Sense16" "Resistor" R-0603 43.5,101.4 r180 bottom value=100 (schematic designator R26)
S1 "2x7Segment" 2x7Segment 126.756,24.424 r90 top
T1 "SM91502ALE" SM91502ALE 107.198,48.554 r0 top
TP1 "VREF1" "Test Point" 253.629,40.934 r0 top
TP2 "VREF2" "Test Point" 243.469,40.934 r0 top
TP3 "5V0" "Test Point" 223.276,40.934 r0 top
TP4 "IBIAS" "Test Point" 210.195,40.934 r0 top
TP5 "ICMP" "Test Point" 206.512,40.934 r0 top
TP6 "IPA" "Test Point" 202.829,40.934 r0 top
TP7 "IMA" "Test Point" 199.146,40.934 r0 top
U1 "LTC6811-2" SSOP50P780X200-48N 29.625,53.975 r0 top
U2 "CD74HC4067M96" SOIC127P1030X265-24N 138.44,69.382 r0 top

## Footprints (in the part's own frame and the unit in brackets; to place one, negate y for a bottom-side part, rotate by r counter-clockwise, add the part's x,y. Pads: shape width x height; smd on the part's side, far side on the other; paste and mask are expansions set on the pad)
2x7Segment [mm] "2x7Segment"
  silkscreen extent 0.24,-0.01 17.17,12.8
0466.500NR [mm] "500mA Fast Acting Fuse"
  rect 1.14x2.03 smd: 1(-1.335,0) 2(1.335,0)
  silkscreen extent -0.6,-0.92 0.6,0.91, body extent -1.59,-0.76 1.59,0.76, height 0.58
84953-4 [mm] "FPC Connectors, Flex-to-Board, 4 Position, Right Angle, Surface Mount"
  rect 0.61x2 smd: 1(-1.5,0) 2(-0.5,0) 3(0.5,0) 4(1.5,0)
  rect 2.68x3.6 smd: S1(-4.49,-2.8) S2(4.49,-2.8)
  silkscreen extent -5.96,-6.4 5.96,0.27, body extent -5.96,-6.44 5.96,0.11, height 2.59
84953-5 [mm] "FPC Connectors, Flex-to-Board, 5 Position, Right Angle, Surface Mount"
  rect 0.61x2 smd: 1(-2,0) 2(-1,0) 3(0,0) 4(1,0) 5(2,0)
  rect 2.68x3.6 smd: S1(-4.99,-2.8) S2(4.99,-2.8)
  silkscreen extent -6.46,-6.4 6.46,0.27, body extent -6.47,-6.44 6.47,0.11, height 2.59
84953-8 [mm] "FPC Connectors, 8POS"
  rect 0.61x2 smd: 1(-3.5,0) 2(-2.5,0) 3(-1.5,0) 4(-0.5,0) 5(0.5,0) 6(1.5,0) 7(2.5,0) 8(3.5,0)
  rect 2.68x3.6 smd: S1(-6.49,-2.8) S2(6.49,-2.8)
  silkscreen extent -7.96,-6.4 7.96,0.27, body extent -7.96,-6.44 7.97,0.11, height 2.59
C-0402 [mm] "0402 Capacitor"
  rect 0.6x0.7 smd: 1(-0.5,0) 2(0.5,0)
  body extent -0.55,-0.3 0.55,0.3, height 0.5
C_0603 [mm] "0603 Capacitor"
  rect 0.95x1 smd: 1(-0.8,0) 2(0.8,0)
  silkscreen extent 0,-0.3 0,0.3, body extent -0.87,-0.48 0.88,0.48, height 0.9
FP-SOT23-MFG [mm]
  rect 0.7x0.6 smd paste-1000 mask+0: 1(-1,0.95) 2(-1,-0.95) 3(1,0)
  silkscreen extent -0.7,-1.5 0.7,1.5, body extent -1.5,-1.65 1.5,1.65, height 0.25
"LED (0603)" [mm]
  rect 0.8x0.8 smd: 1(-0.8,0) 2(0.8,0)
  silkscreen extent -1.46,0.56 -1.36,0.66, body extent -0.8,-0.4 0.8,0.4, height 0.41
"LFPAK56 (SOT669)" [mm] "4 Lead SOT"
  rect 0.7x1.15 smd: 1(-1.905,-2) 2(-0.635,-2) 3(0.635,-2) 4(1.905,-2)
  rect 4.7x4.6 smd: 5(0,2)
  body extent -2.5,-2.47 2.5,4.3, height 1.21
NetTie [mm] "NetTie"
  rect 1x1 smd: 1(0,0) 2(2,0)
  Top Layer region: 0.4,-0.4 1.6,-0.4 1.6,0.4 0.4,0.4
R-0603 [mm] "0603 Chip Resistor"
  rect 0.95x0.95 smd: 1(-0.725,0) 2(0.725,0)
  silkscreen extent 0,-0.48 0,0.48, body extent -0.85,-0.48 0.85,0.48, height 0.55
R_0402 [mm] "Chip Resistor, 2-Leads, Body 1.00x0.50mm, IPC Medium Density"
  rect 0.55x0.55 smd: 1(-0.45,0) 2(0.45,0)
  body extent -0.52,-0.27 0.53,0.28, height 0.32
R_2010 [mm]
  rect 1.5x3 smd: 1(-2.65,0) 2(2.65,0)
  silkscreen extent -3.7,-1.9 3.73,1.83, body extent -2.5,-1.25 2.5,1.25, height 0.61
R_2512 [mm] "2512 Resistor"
  rect 1.02x3.18 smd: 1(-3.175,0) 2(3.175,0)
  silkscreen extent -2.17,-1.5 2.22,1.5, body extent -3.15,-1.63 3.2,1.63, height 0.62
SM91502ALE [mm]
  rect 0.76x1.27 smd: 1(0,0) 2(2.54,0) 3(5.08,0) 4(5.08,8.38) 5(2.54,8.38) 6(0,8.38)
  round 0.3 on Top Overlay: ""(-1.15,0.725)
  silkscreen extent -0.75,0.63 5.83,7.75, body extent -1.28,-0.22 6.34,8.67, height 5.73
SOIC127P1030X265-24N [mm] "SOIC, 24-Leads, Body 15.40x7.50mm, Pitch 1.27mm, IPC Medium Density"
  rect 2x0.6 smd: 1(-4.7,6.985) 2(-4.7,5.715) 3(-4.7,4.445) 4(-4.7,3.175) 5(-4.7,1.905) 6(-4.7,0.635) 7(-4.7,-0.635) 8(-4.7,-1.905) 9(-4.7,-3.175) 10(-4.7,-4.445) 11(-4.7,-5.715) 12(-4.7,-6.985) 13(4.7,-6.985) 14(4.7,-5.715) 15(4.7,-4.445) 16(4.7,-3.175) 17(4.7,-1.905) 18(4.7,-0.635) 19(4.7,0.635) 20(4.7,1.905) 21(4.7,3.175) 22(4.7,4.445) 23(4.7,5.715) 24(4.7,6.985)
  silkscreen extent -4.82,-7.8 3.3,7.96, body extent -5.15,-7.8 5.15,7.8, height 2.65
SSOP50P780X200-48N [mm] "SSOP, 48-Leads, Body 12.80x5.30mm, Pitch 0.50mm, IPC Medium Density"
  oval 1.65x0.3 smd: 1(-3.625,5.75) 2(-3.625,5.25) 3(-3.625,4.75) 4(-3.625,4.25) 5(-3.625,3.75) 6(-3.625,3.25) 7(-3.625,2.75) 8(-3.625,2.25) 9(-3.625,1.75) 10(-3.625,1.25) 11(-3.625,0.75) 12(-3.625,0.25) 13(-3.625,-0.25) 14(-3.625,-0.75) 15(-3.625,-1.25) 16(-3.625,-1.75) 17(-3.625,-2.25) 18(-3.625,-2.75) 19(-3.625,-3.25) 20(-3.625,-3.75) 21(-3.625,-4.25) 22(-3.625,-4.75) 23(-3.625,-5.25) 24(-3.625,-5.75) 25(3.625,-5.75) 26(3.625,-5.25) 27(3.625,-4.75) 28(3.625,-4.25) 29(3.625,-3.75) 30(3.625,-3.25) 31(3.625,-2.75) 32(3.625,-2.25) 33(3.625,-1.75) 34(3.625,-1.25) 35(3.625,-0.75) 36(3.625,-0.25) 37(3.625,0.25) 38(3.625,0.75) 39(3.625,1.25) 40(3.625,1.75) 41(3.625,2.25) 42(3.625,2.75) 43(3.625,3.25) 44(3.625,3.75) 45(3.625,4.25) 46(3.625,4.75) 47(3.625,5.25) 48(3.625,5.75)
  silkscreen extent -3.75,-6.55 2.4,6.57, body extent -3.9,-6.55 3.9,6.55, height 2
TE_2-1445057-2 [mm]
  rect 1.27x2.92 smd: 1(1.5,5.48) 2(-1.5,5.48)
  rect 3.43x1.65 smd: P1(5.205,0) P2(-5.205,0)
  silkscreen extent -5,-5.58 5,5.58, body extent -6.62,-4.57 6.62,6.59, height 5.68
"Test Point" [mm] "1.2mm Test point"
  round 1.2 smd: 1(0,0)